# EAGLE board 13782-AK9753 Human Movement Sensor-panel.10 (EAGLE 7.5.0), part 1 of 6
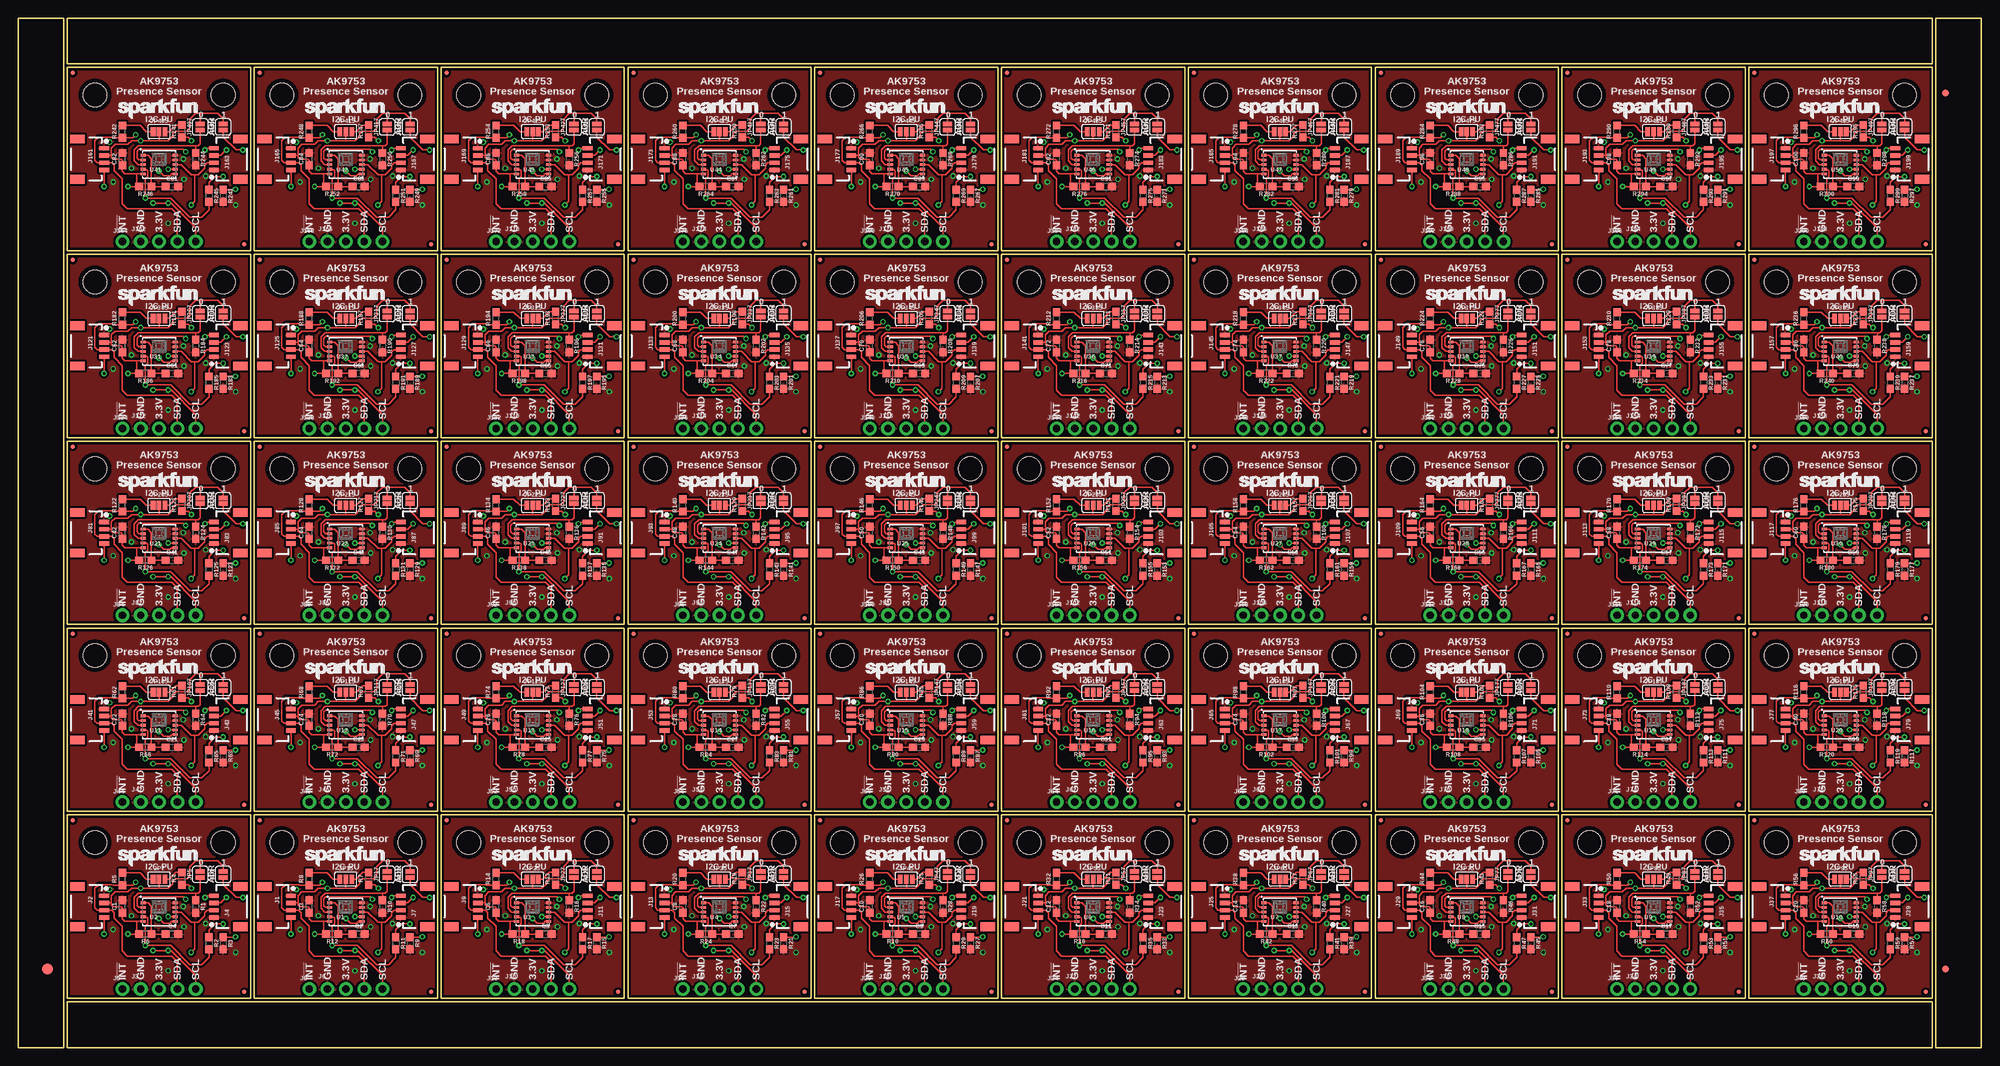
[diagram p0: board, top side]
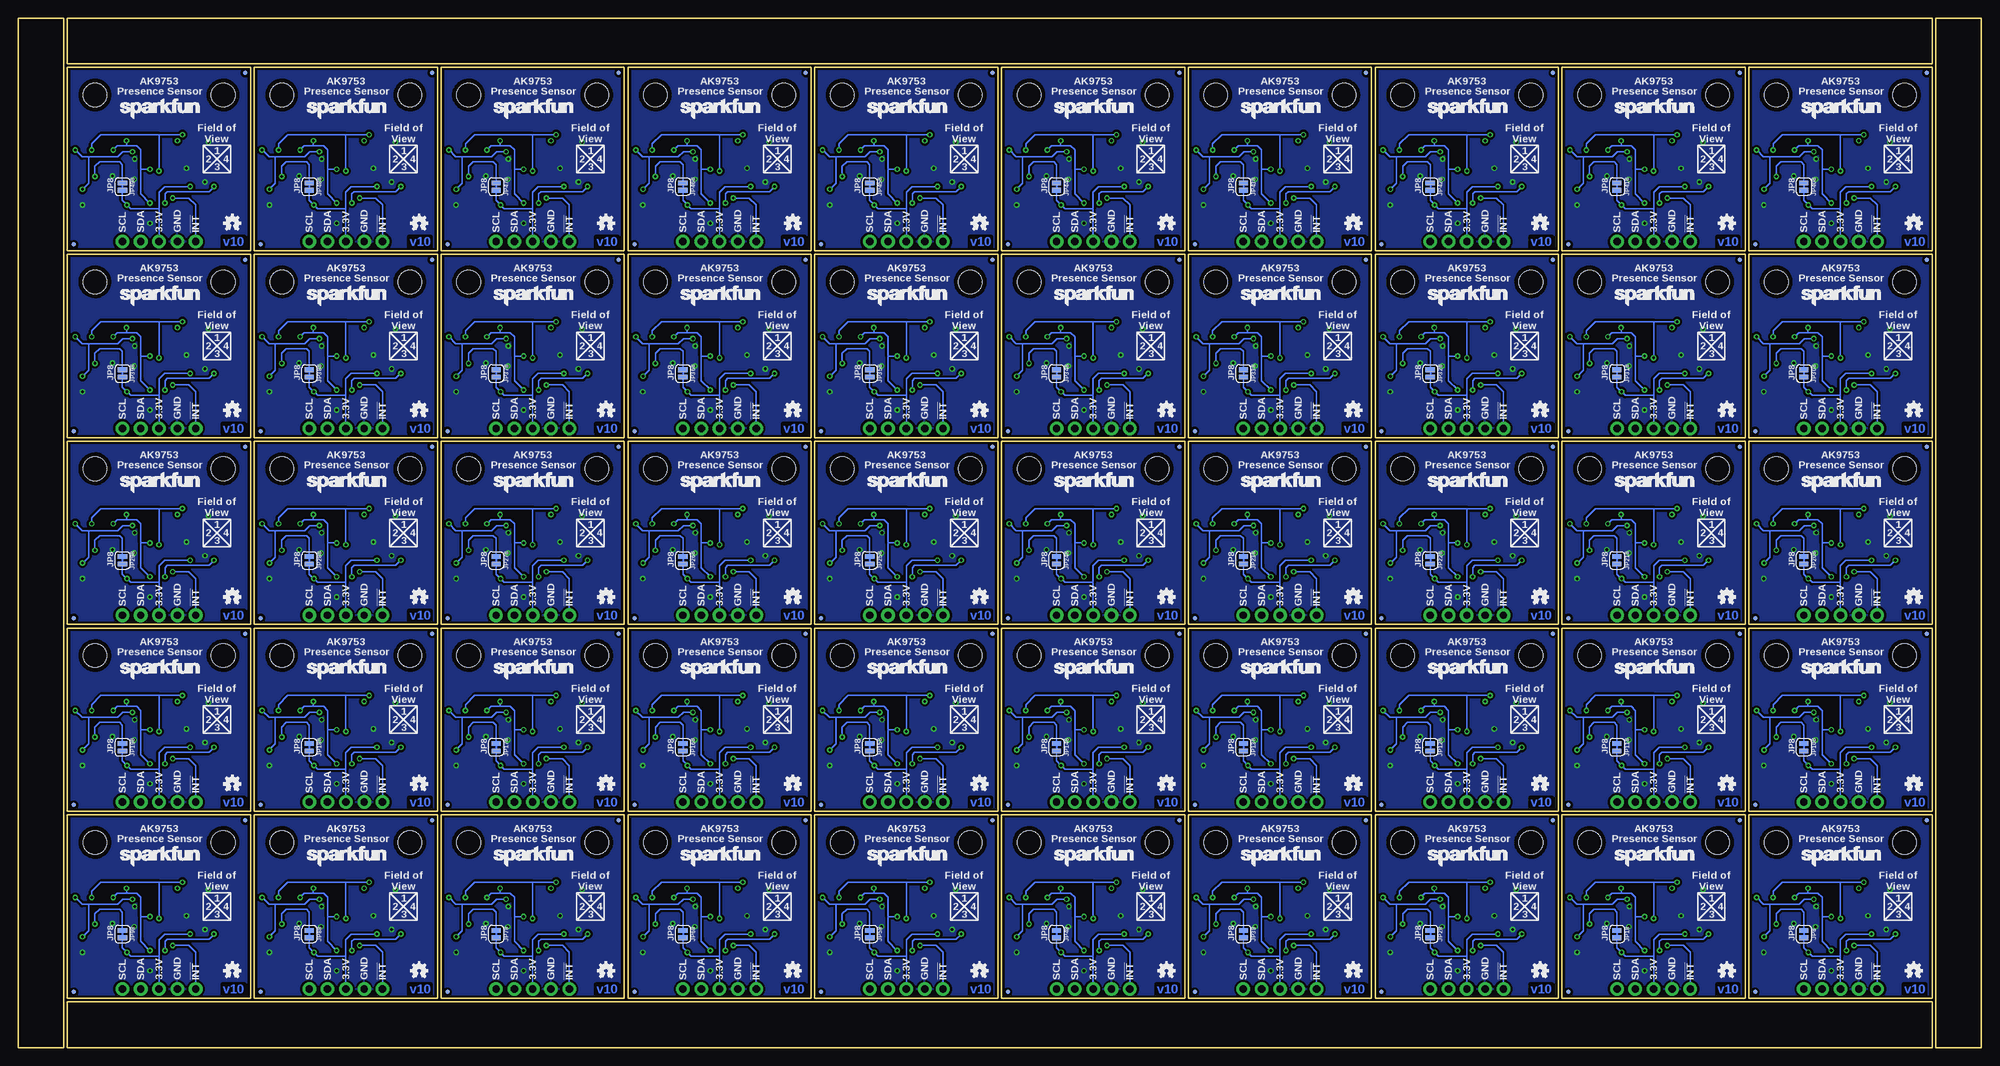
[diagram p1: board, bottom side, seen from below]

Size 272.29 x 142.75 mm. Coordinates in mm from the lower left corner, seen from the top.
Outline: 224 segments
Copper layers (1*16): Top 0.035mm / dielectric 1.5mm / Bottom 0.035mm
Design rules "SparkFun-2-layer-TIGHT": minimum track width 7mil, minimum drill 15mil, track to track 7mil, track to pad 7mil, pad to pad 7mil, via to via 7mil, smd to smd 7mil, copper to edge 7mil, drill to drill 7mil, minimum pad ring 7mil, minimum via ring 7mil, stop-mask expansion 4mil, vias tented up to drill 25mil, thermal gap 10mil

## Footprints (pad centres in the part's own frame; a part is rotated, then mirrored left to right if it is on the bottom)
0603 = smd 1.1 x 1: 1 -0.85,0; 2 0.85,0
FIDUCIAL-1.5X3 = smd 1.5 x 1.5: 1 0,0
FIDUCIAL-1X2 = smd 1 x 1: 1 0,0
1X04_1MM_RA = smd 0.6 x 1.35: 1 -1.5,0; 2 -0.5,0; 3 0.5,0; 4 1.5,0 | smd 1.2 x 2: NC1 2.8,-3.675; NC2 -2.8,-3.675
1X04_NO_SILK = drill 1.016 pad 1.88: 1 0,0; 2 2.54,0; 3 5.08,0; 4 7.62,0
1X01_NO_SILK = drill 1.016 pad 1.88: 1 0,0
SMT-JUMPER_2_NO_SILK = smd 0.635 x 1.27: 1 -0.406,0; 2 0.406,0
MICRO-FIDUCIAL = smd 0.635 x 0.635: 1 0,0
STAND-OFF = hole 3.302: 0,0
SMT-JUMPER_3_2-NC_PASTE_SILK = smd 0.635 x 1.27: 1 -0.813,0; 2 0,0; 3 0.813,0
SMT-JUMPER_2_NC_TRACE_SILK = smd 0.635 x 1.27: 1 -0.508,0; 2 0.508,0
SON10 = smd 0.7 x 0.38: 1 2.225,1.3; 2 2.225,0.65; 3 2.225,0; 4 2.225,-0.65; 5 2.225,-1.3; 6 -2.225,-1.3; 7 -2.225,-0.65; 8 -2.225,0; 9 -2.225,0.65; 10 -2.225,1.3

## Placement (x,y rotation side)
C1  1.0uF  [0603]  14.48,19.56 90 top
C2  1.0uF  [0603]  47.24,15.75 0 top
C3  1.0uF  [0603]  40.39,19.56 90 top
C4  1.0uF  [0603]  21.34,15.75 0 top
C5  1.0uF  [0603]  73.15,15.75 0 top
C6  1.0uF  [0603]  66.29,19.56 90 top
C7  1.0uF  [0603]  99.06,15.75 0 top
C8  1.0uF  [0603]  92.2,19.56 90 top
C9  1.0uF  [0603]  124.97,15.75 0 top
C10  1.0uF  [0603]  118.11,19.56 90 top
C11  1.0uF  [0603]  150.88,15.75 0 top
C12  1.0uF  [0603]  144.02,19.56 90 top
C13  1.0uF  [0603]  176.78,15.75 0 top
C14  1.0uF  [0603]  169.93,19.56 90 top
C15  1.0uF  [0603]  202.69,15.75 0 top
C16  1.0uF  [0603]  195.83,19.56 90 top
C17  1.0uF  [0603]  228.6,15.75 0 top
C18  1.0uF  [0603]  221.74,19.56 90 top
C19  1.0uF  [0603]  254.51,15.75 0 top
C20  1.0uF  [0603]  247.65,19.56 90 top
C21  1.0uF  [0603]  21.34,41.66 0 top
C22  1.0uF  [0603]  14.48,45.47 90 top
C23  1.0uF  [0603]  47.24,41.66 0 top
C24  1.0uF  [0603]  40.39,45.47 90 top
C25  1.0uF  [0603]  73.15,41.66 0 top
C26  1.0uF  [0603]  66.29,45.47 90 top
C27  1.0uF  [0603]  99.06,41.66 0 top
C28  1.0uF  [0603]  92.2,45.47 90 top
C29  1.0uF  [0603]  124.97,41.66 0 top
C30  1.0uF  [0603]  118.11,45.47 90 top
C31  1.0uF  [0603]  150.88,41.66 0 top
C32  1.0uF  [0603]  144.02,45.47 90 top
C33  1.0uF  [0603]  176.78,41.66 0 top
C34  1.0uF  [0603]  169.93,45.47 90 top
C35  1.0uF  [0603]  202.69,41.66 0 top
C36  1.0uF  [0603]  195.83,45.47 90 top
C37  1.0uF  [0603]  228.6,41.66 0 top
C38  1.0uF  [0603]  221.74,45.47 90 top
C39  1.0uF  [0603]  254.51,41.66 0 top
C40  1.0uF  [0603]  247.65,45.47 90 top
C41  1.0uF  [0603]  21.34,67.56 0 top
C42  1.0uF  [0603]  14.48,71.37 90 top
C43  1.0uF  [0603]  47.24,67.56 0 top
C44  1.0uF  [0603]  40.39,71.37 90 top
C45  1.0uF  [0603]  73.15,67.56 0 top
C46  1.0uF  [0603]  66.29,71.37 90 top
C47  1.0uF  [0603]  99.06,67.56 0 top
C48  1.0uF  [0603]  92.2,71.37 90 top
C49  1.0uF  [0603]  124.97,67.56 0 top
C50  1.0uF  [0603]  118.11,71.37 90 top
C51  1.0uF  [0603]  150.88,67.56 0 top
C52  1.0uF  [0603]  144.02,71.37 90 top
C53  1.0uF  [0603]  176.78,67.56 0 top
C54  1.0uF  [0603]  169.93,71.37 90 top
C55  1.0uF  [0603]  202.69,67.56 0 top
C56  1.0uF  [0603]  195.83,71.37 90 top
C57  1.0uF  [0603]  228.6,67.56 0 top
C58  1.0uF  [0603]  221.74,71.37 90 top
C59  1.0uF  [0603]  254.51,67.56 0 top
C60  1.0uF  [0603]  247.65,71.37 90 top
C61  1.0uF  [0603]  21.34,93.47 0 top
C62  1.0uF  [0603]  14.48,97.28 90 top
C63  1.0uF  [0603]  47.24,93.47 0 top
C64  1.0uF  [0603]  40.39,97.28 90 top
C65  1.0uF  [0603]  73.15,93.47 0 top
C66  1.0uF  [0603]  66.29,97.28 90 top
C67  1.0uF  [0603]  99.06,93.47 0 top
C68  1.0uF  [0603]  92.2,97.28 90 top
C69  1.0uF  [0603]  124.97,93.47 0 top
C70  1.0uF  [0603]  118.11,97.28 90 top
C71  1.0uF  [0603]  150.88,93.47 0 top
C72  1.0uF  [0603]  144.02,97.28 90 top
C73  1.0uF  [0603]  176.78,93.47 0 top
C74  1.0uF  [0603]  169.93,97.28 90 top
C75  1.0uF  [0603]  202.69,93.47 0 top
C76  1.0uF  [0603]  195.83,97.28 90 top
C77  1.0uF  [0603]  228.6,93.47 0 top
C78  1.0uF  [0603]  221.74,97.28 90 top
C79  1.0uF  [0603]  254.51,93.47 0 top
C80  1.0uF  [0603]  247.65,97.28 90 top
C81  1.0uF  [0603]  21.34,119.38 0 top
C82  1.0uF  [0603]  14.48,123.19 90 top
C83  1.0uF  [0603]  47.24,119.38 0 top
C84  1.0uF  [0603]  40.39,123.19 90 top
C85  1.0uF  [0603]  73.15,119.38 0 top
C86  1.0uF  [0603]  66.29,123.19 90 top
C87  1.0uF  [0603]  99.06,119.38 0 top
C88  1.0uF  [0603]  92.2,123.19 90 top
C89  1.0uF  [0603]  124.97,119.38 0 top
C90  1.0uF  [0603]  118.11,123.19 90 top
C91  1.0uF  [0603]  150.88,119.38 0 top
C92  1.0uF  [0603]  144.02,123.19 90 top
C93  1.0uF  [0603]  176.78,119.38 0 top
C94  1.0uF  [0603]  169.93,123.19 90 top
C95  1.0uF  [0603]  202.69,119.38 0 top
C96  1.0uF  [0603]  195.83,123.19 90 top
C97  1.0uF  [0603]  228.6,119.38 0 top
C98  1.0uF  [0603]  221.74,123.19 90 top
C99  1.0uF  [0603]  254.51,119.38 0 top
C100  1.0uF  [0603]  247.65,123.19 90 top
E$1  [FIDUCIAL-1.5X3]  4.06,10.92 0 top
E$7  [FIDUCIAL-1X2]  267.33,132.33 180 top
E$8  [FIDUCIAL-1X2]  267.33,10.92 0 top
J1  [1X04_1MM_RA]  37.85,19.56 270 top
J2  [1X04_1MM_RA]  11.94,19.56 270 top
J3  PTH  [1X04_NO_SILK]  17.02,8.13 0 top
J4  [1X04_1MM_RA]  27.18,19.56 90 top
J5  [1X01_NO_SILK]  14.48,8.13 0 top
J6  PTH  [1X04_NO_SILK]  42.93,8.13 0 top
J7  [1X04_1MM_RA]  53.09,19.56 90 top
J8  [1X01_NO_SILK]  40.39,8.13 0 top
J9  [1X04_1MM_RA]  63.75,19.56 270 top
J10  PTH  [1X04_NO_SILK]  68.83,8.13 0 top
J11  [1X04_1MM_RA]  78.99,19.56 90 top
J12  [1X01_NO_SILK]  66.29,8.13 0 top
J13  [1X04_1MM_RA]  89.66,19.56 270 top
J14  PTH  [1X04_NO_SILK]  94.74,8.13 0 top
J15  [1X04_1MM_RA]  104.9,19.56 90 top
J16  [1X01_NO_SILK]  92.2,8.13 0 top
J17  [1X04_1MM_RA]  115.57,19.56 270 top
J18  PTH  [1X04_NO_SILK]  120.65,8.13 0 top
J19  [1X04_1MM_RA]  130.81,19.56 90 top
J20  [1X01_NO_SILK]  118.11,8.13 0 top
J21  [1X04_1MM_RA]  141.48,19.56 270 top
J22  PTH  [1X04_NO_SILK]  146.56,8.13 0 top
J23  [1X04_1MM_RA]  156.72,19.56 90 top
J24  [1X01_NO_SILK]  144.02,8.13 0 top
J25  [1X04_1MM_RA]  167.39,19.56 270 top
J26  PTH  [1X04_NO_SILK]  172.47,8.13 0 top
J27  [1X04_1MM_RA]  182.63,19.56 90 top
J28  [1X01_NO_SILK]  169.93,8.13 0 top
J29  [1X04_1MM_RA]  193.29,19.56 270 top
J30  PTH  [1X04_NO_SILK]  198.37,8.13 0 top
J31  [1X04_1MM_RA]  208.53,19.56 90 top
J32  [1X01_NO_SILK]  195.83,8.13 0 top
J33  [1X04_1MM_RA]  219.2,19.56 270 top
J34  PTH  [1X04_NO_SILK]  224.28,8.13 0 top
J35  [1X04_1MM_RA]  234.44,19.56 90 top
J36  [1X01_NO_SILK]  221.74,8.13 0 top
J37  [1X04_1MM_RA]  245.11,19.56 270 top
J38  PTH  [1X04_NO_SILK]  250.19,8.13 0 top
J39  [1X04_1MM_RA]  260.35,19.56 90 top
J40  [1X01_NO_SILK]  247.65,8.13 0 top
J41  [1X04_1MM_RA]  11.94,45.47 270 top
J42  PTH  [1X04_NO_SILK]  17.02,34.04 0 top
J43  [1X04_1MM_RA]  27.18,45.47 90 top
J44  [1X01_NO_SILK]  14.48,34.04 0 top
J45  [1X04_1MM_RA]  37.85,45.47 270 top
J46  PTH  [1X04_NO_SILK]  42.93,34.04 0 top
J47  [1X04_1MM_RA]  53.09,45.47 90 top
J48  [1X01_NO_SILK]  40.39,34.04 0 top
J49  [1X04_1MM_RA]  63.75,45.47 270 top
J50  PTH  [1X04_NO_SILK]  68.83,34.04 0 top
J51  [1X04_1MM_RA]  78.99,45.47 90 top
J52  [1X01_NO_SILK]  66.29,34.04 0 top
J53  [1X04_1MM_RA]  89.66,45.47 270 top
J54  PTH  [1X04_NO_SILK]  94.74,34.04 0 top
J55  [1X04_1MM_RA]  104.9,45.47 90 top
J56  [1X01_NO_SILK]  92.2,34.04 0 top
J57  [1X04_1MM_RA]  115.57,45.47 270 top
J58  PTH  [1X04_NO_SILK]  120.65,34.04 0 top
J59  [1X04_1MM_RA]  130.81,45.47 90 top
J60  [1X01_NO_SILK]  118.11,34.04 0 top
J61  [1X04_1MM_RA]  141.48,45.47 270 top
J62  PTH  [1X04_NO_SILK]  146.56,34.04 0 top
J63  [1X04_1MM_RA]  156.72,45.47 90 top
J64  [1X01_NO_SILK]  144.02,34.04 0 top
J65  [1X04_1MM_RA]  167.39,45.47 270 top
J66  PTH  [1X04_NO_SILK]  172.47,34.04 0 top
J67  [1X04_1MM_RA]  182.63,45.47 90 top
J68  [1X01_NO_SILK]  169.93,34.04 0 top
J69  [1X04_1MM_RA]  193.29,45.47 270 top
J70  PTH  [1X04_NO_SILK]  198.37,34.04 0 top
J71  [1X04_1MM_RA]  208.53,45.47 90 top
J72  [1X01_NO_SILK]  195.83,34.04 0 top
J73  [1X04_1MM_RA]  219.2,45.47 270 top
J74  PTH  [1X04_NO_SILK]  224.28,34.04 0 top
J75  [1X04_1MM_RA]  234.44,45.47 90 top
J76  [1X01_NO_SILK]  221.74,34.04 0 top
J77  [1X04_1MM_RA]  245.11,45.47 270 top
J78  PTH  [1X04_NO_SILK]  250.19,34.04 0 top
J79  [1X04_1MM_RA]  260.35,45.47 90 top
J80  [1X01_NO_SILK]  247.65,34.04 0 top
J81  [1X04_1MM_RA]  11.94,71.37 270 top
J82  PTH  [1X04_NO_SILK]  17.02,59.94 0 top
J83  [1X04_1MM_RA]  27.18,71.37 90 top
J84  [1X01_NO_SILK]  14.48,59.94 0 top
J85  [1X04_1MM_RA]  37.85,71.37 270 top
J86  PTH  [1X04_NO_SILK]  42.93,59.94 0 top
J87  [1X04_1MM_RA]  53.09,71.37 90 top
J88  [1X01_NO_SILK]  40.39,59.94 0 top
J89  [1X04_1MM_RA]  63.75,71.37 270 top
J90  PTH  [1X04_NO_SILK]  68.83,59.94 0 top
J91  [1X04_1MM_RA]  78.99,71.37 90 top
J92  [1X01_NO_SILK]  66.29,59.94 0 top
J93  [1X04_1MM_RA]  89.66,71.37 270 top
J94  PTH  [1X04_NO_SILK]  94.74,59.94 0 top
J95  [1X04_1MM_RA]  104.9,71.37 90 top
J96  [1X01_NO_SILK]  92.2,59.94 0 top
J97  [1X04_1MM_RA]  115.57,71.37 270 top
J98  PTH  [1X04_NO_SILK]  120.65,59.94 0 top
J99  [1X04_1MM_RA]  130.81,71.37 90 top
J100  [1X01_NO_SILK]  118.11,59.94 0 top
J101  [1X04_1MM_RA]  141.48,71.37 270 top
J102  PTH  [1X04_NO_SILK]  146.56,59.94 0 top
J103  [1X04_1MM_RA]  156.72,71.37 90 top
J104  [1X01_NO_SILK]  144.02,59.94 0 top
J105  [1X04_1MM_RA]  167.39,71.37 270 top
J106  PTH  [1X04_NO_SILK]  172.47,59.94 0 top
J107  [1X04_1MM_RA]  182.63,71.37 90 top
J108  [1X01_NO_SILK]  169.93,59.94 0 top
J109  [1X04_1MM_RA]  193.29,71.37 270 top
J110  PTH  [1X04_NO_SILK]  198.37,59.94 0 top
J111  [1X04_1MM_RA]  208.53,71.37 90 top
J112  [1X01_NO_SILK]  195.83,59.94 0 top
J113  [1X04_1MM_RA]  219.2,71.37 270 top
J114  PTH  [1X04_NO_SILK]  224.28,59.94 0 top
J115  [1X04_1MM_RA]  234.44,71.37 90 top
J116  [1X01_NO_SILK]  221.74,59.94 0 top
J117  [1X04_1MM_RA]  245.11,71.37 270 top
J118  PTH  [1X04_NO_SILK]  250.19,59.94 0 top
J119  [1X04_1MM_RA]  260.35,71.37 90 top
J120  [1X01_NO_SILK]  247.65,59.94 0 top
J121  [1X04_1MM_RA]  11.94,97.28 270 top
J122  PTH  [1X04_NO_SILK]  17.02,85.85 0 top
J123  [1X04_1MM_RA]  27.18,97.28 90 top
J124  [1X01_NO_SILK]  14.48,85.85 0 top
J125  [1X04_1MM_RA]  37.85,97.28 270 top
J126  PTH  [1X04_NO_SILK]  42.93,85.85 0 top
J127  [1X04_1MM_RA]  53.09,97.28 90 top
J128  [1X01_NO_SILK]  40.39,85.85 0 top
J129  [1X04_1MM_RA]  63.75,97.28 270 top
J130  PTH  [1X04_NO_SILK]  68.83,85.85 0 top
J131  [1X04_1MM_RA]  78.99,97.28 90 top
J132  [1X01_NO_SILK]  66.29,85.85 0 top
J133  [1X04_1MM_RA]  89.66,97.28 270 top
J134  PTH  [1X04_NO_SILK]  94.74,85.85 0 top
J135  [1X04_1MM_RA]  104.9,97.28 90 top
J136  [1X01_NO_SILK]  92.2,85.85 0 top
J137  [1X04_1MM_RA]  115.57,97.28 270 top
J138  PTH  [1X04_NO_SILK]  120.65,85.85 0 top
J139  [1X04_1MM_RA]  130.81,97.28 90 top
J140  [1X01_NO_SILK]  118.11,85.85 0 top
J141  [1X04_1MM_RA]  141.48,97.28 270 top
J142  PTH  [1X04_NO_SILK]  146.56,85.85 0 top
J143  [1X04_1MM_RA]  156.72,97.28 90 top
J144  [1X01_NO_SILK]  144.02,85.85 0 top
J145  [1X04_1MM_RA]  167.39,97.28 270 top
J146  PTH  [1X04_NO_SILK]  172.47,85.85 0 top
J147  [1X04_1MM_RA]  182.63,97.28 90 top
J148  [1X01_NO_SILK]  169.93,85.85 0 top
J149  [1X04_1MM_RA]  193.29,97.28 270 top
J150  PTH  [1X04_NO_SILK]  198.37,85.85 0 top
J151  [1X04_1MM_RA]  208.53,97.28 90 top
J152  [1X01_NO_SILK]  195.83,85.85 0 top
J153  [1X04_1MM_RA]  219.2,97.28 270 top
J154  PTH  [1X04_NO_SILK]  224.28,85.85 0 top
J155  [1X04_1MM_RA]  234.44,97.28 90 top
J156  [1X01_NO_SILK]  221.74,85.85 0 top
J157  [1X04_1MM_RA]  245.11,97.28 270 top
J158  PTH  [1X04_NO_SILK]  250.19,85.85 0 top
J159  [1X04_1MM_RA]  260.35,97.28 90 top
J160  [1X01_NO_SILK]  247.65,85.85 0 top
J161  [1X04_1MM_RA]  11.94,123.19 270 top
J162  PTH  [1X04_NO_SILK]  17.02,111.76 0 top
J163  [1X04_1MM_RA]  27.18,123.19 90 top
J164  [1X01_NO_SILK]  14.48,111.76 0 top
J165  [1X04_1MM_RA]  37.85,123.19 270 top
J166  PTH  [1X04_NO_SILK]  42.93,111.76 0 top
J167  [1X04_1MM_RA]  53.09,123.19 90 top
J168  [1X01_NO_SILK]  40.39,111.76 0 top
J169  [1X04_1MM_RA]  63.75,123.19 270 top
J170  PTH  [1X04_NO_SILK]  68.83,111.76 0 top
J171  [1X04_1MM_RA]  78.99,123.19 90 top
J172  [1X01_NO_SILK]  66.29,111.76 0 top
J173  [1X04_1MM_RA]  89.66,123.19 270 top
J174  PTH  [1X04_NO_SILK]  94.74,111.76 0 top
J175  [1X04_1MM_RA]  104.9,123.19 90 top
J176  [1X01_NO_SILK]  92.2,111.76 0 top
J177  [1X04_1MM_RA]  115.57,123.19 270 top
J178  PTH  [1X04_NO_SILK]  120.65,111.76 0 top
J179  [1X04_1MM_RA]  130.81,123.19 90 top
J180  [1X01_NO_SILK]  118.11,111.76 0 top
J181  [1X04_1MM_RA]  141.48,123.19 270 top
J182  PTH  [1X04_NO_SILK]  146.56,111.76 0 top
J183  [1X04_1MM_RA]  156.72,123.19 90 top
J184  [1X01_NO_SILK]  144.02,111.76 0 top
J185  [1X04_1MM_RA]  167.39,123.19 270 top
J186  PTH  [1X04_NO_SILK]  172.47,111.76 0 top
J187  [1X04_1MM_RA]  182.63,123.19 90 top
J188  [1X01_NO_SILK]  169.93,111.76 0 top
J189  [1X04_1MM_RA]  193.29,123.19 270 top
J190  PTH  [1X04_NO_SILK]  198.37,111.76 0 top
J191  [1X04_1MM_RA]  208.53,123.19 90 top
J192  [1X01_NO_SILK]  195.83,111.76 0 top
J193  [1X04_1MM_RA]  219.2,123.19 270 top
J194  PTH  [1X04_NO_SILK]  224.28,111.76 0 top
J195  [1X04_1MM_RA]  234.44,123.19 90 top
J196  [1X01_NO_SILK]  221.74,111.76 0 top
J197  [1X04_1MM_RA]  245.11,123.19 270 top
J198  PTH  [1X04_NO_SILK]  250.19,111.76 0 top
J199  [1X04_1MM_RA]  260.35,123.19 90 top
J200  [1X01_NO_SILK]  247.65,111.76 0 top
JP1  [SMT-JUMPER_2_NO_SILK]  28.45,24 90 top
JP2  FIDUCIALUFIDUCIAL  [MICRO-FIDUCIAL]  31.37,7.75 0 top
JP3  STAND-OFF  [STAND-OFF]  10.67,28.45 0 top
JP4  STAND-OFF  [STAND-OFF]  28.45,28.45 0 top
JP5  [SMT-JUMPER_2_NO_SILK]  25.27,24 90 top
JP6  FIDUCIALUFIDUCIAL  [MICRO-FIDUCIAL]  7.62,31.5 0 top
JP7  [SMT-JUMPER_3_2-NC_PASTE_SILK]  19.56,23.37 0 top
JP8  [SMT-JUMPER_2_NC_TRACE_SILK]  24.64,15.75 270 bottom
JP9  FIDUCIALUFIDUCIAL  [MICRO-FIDUCIAL]  7.62,31.5 0 bottom
JP10  FIDUCIALUFIDUCIAL  [MICRO-FIDUCIAL]  31.37,7.75 0 bottom
JP11  STAND-OFF  [STAND-OFF]  36.58,28.45 0 top
JP12  STAND-OFF  [STAND-OFF]  54.36,28.45 0 top
JP13  FIDUCIALUFIDUCIAL  [MICRO-FIDUCIAL]  57.28,7.75 0 top
JP14  FIDUCIALUFIDUCIAL  [MICRO-FIDUCIAL]  33.53,31.5 0 top
JP15  [SMT-JUMPER_3_2-NC_PASTE_SILK]  45.47,23.37 0 top
JP16  [SMT-JUMPER_2_NO_SILK]  54.36,24 90 top
JP17  [SMT-JUMPER_2_NO_SILK]  51.18,24 90 top
JP18  [SMT-JUMPER_2_NC_TRACE_SILK]  50.55,15.75 270 bottom
JP19  FIDUCIALUFIDUCIAL  [MICRO-FIDUCIAL]  33.53,31.5 0 bottom
JP20  FIDUCIALUFIDUCIAL  [MICRO-FIDUCIAL]  57.28,7.75 0 bottom
JP21  STAND-OFF  [STAND-OFF]  62.48,28.45 0 top
JP22  STAND-OFF  [STAND-OFF]  80.26,28.45 0 top
JP23  FIDUCIALUFIDUCIAL  [MICRO-FIDUCIAL]  83.19,7.75 0 top
JP24  FIDUCIALUFIDUCIAL  [MICRO-FIDUCIAL]  59.44,31.5 0 top
JP25  [SMT-JUMPER_3_2-NC_PASTE_SILK]  71.37,23.37 0 top
JP26  [SMT-JUMPER_2_NO_SILK]  80.26,24 90 top
JP27  [SMT-JUMPER_2_NO_SILK]  77.09,24 90 top
JP28  [SMT-JUMPER_2_NC_TRACE_SILK]  76.45,15.75 270 bottom
JP29  FIDUCIALUFIDUCIAL  [MICRO-FIDUCIAL]  59.44,31.5 0 bottom
JP30  FIDUCIALUFIDUCIAL  [MICRO-FIDUCIAL]  83.19,7.75 0 bottom
JP31  STAND-OFF  [STAND-OFF]  88.39,28.45 0 top
JP32  STAND-OFF  [STAND-OFF]  106.17,28.45 0 top
JP33  FIDUCIALUFIDUCIAL  [MICRO-FIDUCIAL]  109.09,7.75 0 top
JP34  FIDUCIALUFIDUCIAL  [MICRO-FIDUCIAL]  85.34,31.5 0 top
JP35  [SMT-JUMPER_3_2-NC_PASTE_SILK]  97.28,23.37 0 top
JP36  [SMT-JUMPER_2_NO_SILK]  106.17,24 90 top
JP37  [SMT-JUMPER_2_NO_SILK]  103,24 90 top
JP38  [SMT-JUMPER_2_NC_TRACE_SILK]  102.36,15.75 270 bottom
JP39  FIDUCIALUFIDUCIAL  [MICRO-FIDUCIAL]  85.34,31.5 0 bottom
JP40  FIDUCIALUFIDUCIAL  [MICRO-FIDUCIAL]  109.09,7.75 0 bottom
JP41  STAND-OFF  [STAND-OFF]  114.3,28.45 0 top
JP42  STAND-OFF  [STAND-OFF]  132.08,28.45 0 top
JP43  FIDUCIALUFIDUCIAL  [MICRO-FIDUCIAL]  135,7.75 0 top
JP44  FIDUCIALUFIDUCIAL  [MICRO-FIDUCIAL]  111.25,31.5 0 top
JP45  [SMT-JUMPER_3_2-NC_PASTE_SILK]  123.19,23.37 0 top
JP46  [SMT-JUMPER_2_NO_SILK]  132.08,24 90 top
JP47  [SMT-JUMPER_2_NO_SILK]  128.91,24 90 top
JP48  [SMT-JUMPER_2_NC_TRACE_SILK]  128.27,15.75 270 bottom
JP49  FIDUCIALUFIDUCIAL  [MICRO-FIDUCIAL]  111.25,31.5 0 bottom
JP50  FIDUCIALUFIDUCIAL  [MICRO-FIDUCIAL]  135,7.75 0 bottom
JP51  STAND-OFF  [STAND-OFF]  140.21,28.45 0 top
JP52  STAND-OFF  [STAND-OFF]  157.99,28.45 0 top
JP53  FIDUCIALUFIDUCIAL  [MICRO-FIDUCIAL]  160.91,7.75 0 top
JP54  FIDUCIALUFIDUCIAL  [MICRO-FIDUCIAL]  137.16,31.5 0 top
JP55  [SMT-JUMPER_3_2-NC_PASTE_SILK]  149.1,23.37 0 top
JP56  [SMT-JUMPER_2_NO_SILK]  157.99,24 90 top
JP57  [SMT-JUMPER_2_NO_SILK]  154.81,24 90 top
JP58  [SMT-JUMPER_2_NC_TRACE_SILK]  154.18,15.75 270 bottom
JP59  FIDUCIALUFIDUCIAL  [MICRO-FIDUCIAL]  137.16,31.5 0 bottom
JP60  FIDUCIALUFIDUCIAL  [MICRO-FIDUCIAL]  160.91,7.75 0 bottom
JP61  STAND-OFF  [STAND-OFF]  166.12,28.45 0 top
JP62  STAND-OFF  [STAND-OFF]  183.9,28.45 0 top
JP63  FIDUCIALUFIDUCIAL  [MICRO-FIDUCIAL]  186.82,7.75 0 top
JP64  FIDUCIALUFIDUCIAL  [MICRO-FIDUCIAL]  163.07,31.5 0 top
JP65  [SMT-JUMPER_3_2-NC_PASTE_SILK]  175.01,23.37 0 top
JP66  [SMT-JUMPER_2_NO_SILK]  183.9,24 90 top
JP67  [SMT-JUMPER_2_NO_SILK]  180.72,24 90 top
JP68  [SMT-JUMPER_2_NC_TRACE_SILK]  180.09,15.75 270 bottom
JP69  FIDUCIALUFIDUCIAL  [MICRO-FIDUCIAL]  163.07,31.5 0 bottom
JP70  FIDUCIALUFIDUCIAL  [MICRO-FIDUCIAL]  186.82,7.75 0 bottom
JP71  STAND-OFF  [STAND-OFF]  192.02,28.45 0 top
JP72  STAND-OFF  [STAND-OFF]  209.8,28.45 0 top
JP73  FIDUCIALUFIDUCIAL  [MICRO-FIDUCIAL]  212.72,7.75 0 top
JP74  FIDUCIALUFIDUCIAL  [MICRO-FIDUCIAL]  188.98,31.5 0 top
JP75  [SMT-JUMPER_3_2-NC_PASTE_SILK]  200.91,23.37 0 top
JP76  [SMT-JUMPER_2_NO_SILK]  209.8,24 90 top
JP77  [SMT-JUMPER_2_NO_SILK]  206.63,24 90 top
JP78  [SMT-JUMPER_2_NC_TRACE_SILK]  205.99,15.75 270 bottom
JP79  FIDUCIALUFIDUCIAL  [MICRO-FIDUCIAL]  188.98,31.5 0 bottom
JP80  FIDUCIALUFIDUCIAL  [MICRO-FIDUCIAL]  212.72,7.75 0 bottom
JP81  STAND-OFF  [STAND-OFF]  217.93,28.45 0 top
JP82  STAND-OFF  [STAND-OFF]  235.71,28.45 0 top
JP83  FIDUCIALUFIDUCIAL  [MICRO-FIDUCIAL]  238.63,7.75 0 top
JP84  FIDUCIALUFIDUCIAL  [MICRO-FIDUCIAL]  214.88,31.5 0 top
JP85  [SMT-JUMPER_3_2-NC_PASTE_SILK]  226.82,23.37 0 top
JP86  [SMT-JUMPER_2_NO_SILK]  235.71,24 90 top
JP87  [SMT-JUMPER_2_NO_SILK]  232.54,24 90 top
JP88  [SMT-JUMPER_2_NC_TRACE_SILK]  231.9,15.75 270 bottom
JP89  FIDUCIALUFIDUCIAL  [MICRO-FIDUCIAL]  214.88,31.5 0 bottom
JP90  FIDUCIALUFIDUCIAL  [MICRO-FIDUCIAL]  238.63,7.75 0 bottom
JP91  STAND-OFF  [STAND-OFF]  243.84,28.45 0 top
JP92  STAND-OFF  [STAND-OFF]  261.62,28.45 0 top
JP93  FIDUCIALUFIDUCIAL  [MICRO-FIDUCIAL]  264.54,7.75 0 top
JP94  FIDUCIALUFIDUCIAL  [MICRO-FIDUCIAL]  240.79,31.5 0 top
JP95  [SMT-JUMPER_3_2-NC_PASTE_SILK]  252.73,23.37 0 top
JP96  [SMT-JUMPER_2_NO_SILK]  261.62,24 90 top
JP97  [SMT-JUMPER_2_NO_SILK]  258.44,24 90 top
JP98  [SMT-JUMPER_2_NC_TRACE_SILK]  257.81,15.75 270 bottom
JP99  FIDUCIALUFIDUCIAL  [MICRO-FIDUCIAL]  240.79,31.5 0 bottom
JP100  FIDUCIALUFIDUCIAL  [MICRO-FIDUCIAL]  264.54,7.75 0 bottom
JP101  STAND-OFF  [STAND-OFF]  10.67,54.36 0 top
JP102  STAND-OFF  [STAND-OFF]  28.45,54.36 0 top
JP103  FIDUCIALUFIDUCIAL  [MICRO-FIDUCIAL]  31.37,33.66 0 top
JP104  FIDUCIALUFIDUCIAL  [MICRO-FIDUCIAL]  7.62,57.4 0 top
JP105  [SMT-JUMPER_3_2-NC_PASTE_SILK]  19.56,49.28 0 top
JP106  [SMT-JUMPER_2_NO_SILK]  28.45,49.91 90 top
JP107  [SMT-JUMPER_2_NO_SILK]  25.27,49.91 90 top
JP108  [SMT-JUMPER_2_NC_TRACE_SILK]  24.64,41.66 270 bottom
JP109  FIDUCIALUFIDUCIAL  [MICRO-FIDUCIAL]  7.62,57.4 0 bottom
JP110  FIDUCIALUFIDUCIAL  [MICRO-FIDUCIAL]  31.37,33.66 0 bottom
JP111  STAND-OFF  [STAND-OFF]  36.58,54.36 0 top
JP112  STAND-OFF  [STAND-OFF]  54.36,54.36 0 top
JP113  FIDUCIALUFIDUCIAL  [MICRO-FIDUCIAL]  57.28,33.66 0 top
JP114  FIDUCIALUFIDUCIAL  [MICRO-FIDUCIAL]  33.53,57.4 0 top
JP115  [SMT-JUMPER_3_2-NC_PASTE_SILK]  45.47,49.28 0 top
JP116  [SMT-JUMPER_2_NO_SILK]  54.36,49.91 90 top
JP117  [SMT-JUMPER_2_NO_SILK]  51.18,49.91 90 top
JP118  [SMT-JUMPER_2_NC_TRACE_SILK]  50.55,41.66 270 bottom
JP119  FIDUCIALUFIDUCIAL  [MICRO-FIDUCIAL]  33.53,57.4 0 bottom
JP120  FIDUCIALUFIDUCIAL  [MICRO-FIDUCIAL]  57.28,33.66 0 bottom
JP121  STAND-OFF  [STAND-OFF]  62.48,54.36 0 top
JP122  STAND-OFF  [STAND-OFF]  80.26,54.36 0 top
JP123  FIDUCIALUFIDUCIAL  [MICRO-FIDUCIAL]  83.19,33.66 0 top
JP124  FIDUCIALUFIDUCIAL  [MICRO-FIDUCIAL]  59.44,57.4 0 top
JP125  [SMT-JUMPER_3_2-NC_PASTE_SILK]  71.37,49.28 0 top
JP126  [SMT-JUMPER_2_NO_SILK]  80.26,49.91 90 top
JP127  [SMT-JUMPER_2_NO_SILK]  77.09,49.91 90 top
JP128  [SMT-JUMPER_2_NC_TRACE_SILK]  76.45,41.66 270 bottom
JP129  FIDUCIALUFIDUCIAL  [MICRO-FIDUCIAL]  59.44,57.4 0 bottom
JP130  FIDUCIALUFIDUCIAL  [MICRO-FIDUCIAL]  83.19,33.66 0 bottom
JP131  STAND-OFF  [STAND-OFF]  88.39,54.36 0 top
JP132  STAND-OFF  [STAND-OFF]  106.17,54.36 0 top
JP133  FIDUCIALUFIDUCIAL  [MICRO-FIDUCIAL]  109.09,33.66 0 top
JP134  FIDUCIALUFIDUCIAL  [MICRO-FIDUCIAL]  85.34,57.4 0 top
JP135  [SMT-JUMPER_3_2-NC_PASTE_SILK]  97.28,49.28 0 top
JP136  [SMT-JUMPER_2_NO_SILK]  106.17,49.91 90 top
JP137  [SMT-JUMPER_2_NO_SILK]  103,49.91 90 top
JP138  [SMT-JUMPER_2_NC_TRACE_SILK]  102.36,41.66 270 bottom
JP139  FIDUCIALUFIDUCIAL  [MICRO-FIDUCIAL]  85.34,57.4 0 bottom
JP140  FIDUCIALUFIDUCIAL  [MICRO-FIDUCIAL]  109.09,33.66 0 bottom
JP141  STAND-OFF  [STAND-OFF]  114.3,54.36 0 top
JP142  STAND-OFF  [STAND-OFF]  132.08,54.36 0 top
JP143  FIDUCIALUFIDUCIAL  [MICRO-FIDUCIAL]  135,33.66 0 top
JP144  FIDUCIALUFIDUCIAL  [MICRO-FIDUCIAL]  111.25,57.4 0 top
JP145  [SMT-JUMPER_3_2-NC_PASTE_SILK]  123.19,49.28 0 top
JP146  [SMT-JUMPER_2_NO_SILK]  132.08,49.91 90 top
JP147  [SMT-JUMPER_2_NO_SILK]  128.91,49.91 90 top
JP148  [SMT-JUMPER_2_NC_TRACE_SILK]  128.27,41.66 270 bottom
JP149  FIDUCIALUFIDUCIAL  [MICRO-FIDUCIAL]  111.25,57.4 0 bottom
JP150  FIDUCIALUFIDUCIAL  [MICRO-FIDUCIAL]  135,33.66 0 bottom
JP151  STAND-OFF  [STAND-OFF]  140.21,54.36 0 top
JP152  STAND-OFF  [STAND-OFF]  157.99,54.36 0 top
JP153  FIDUCIALUFIDUCIAL  [MICRO-FIDUCIAL]  160.91,33.66 0 top
JP154  FIDUCIALUFIDUCIAL  [MICRO-FIDUCIAL]  137.16,57.4 0 top
JP155  [SMT-JUMPER_3_2-NC_PASTE_SILK]  149.1,49.28 0 top
JP156  [SMT-JUMPER_2_NO_SILK]  157.99,49.91 90 top
JP157  [SMT-JUMPER_2_NO_SILK]  154.81,49.91 90 top
JP158  [SMT-JUMPER_2_NC_TRACE_SILK]  154.18,41.66 270 bottom
JP159  FIDUCIALUFIDUCIAL  [MICRO-FIDUCIAL]  137.16,57.4 0 bottom
JP160  FIDUCIALUFIDUCIAL  [MICRO-FIDUCIAL]  160.91,33.66 0 bottom
JP161  STAND-OFF  [STAND-OFF]  166.12,54.36 0 top
JP162  STAND-OFF  [STAND-OFF]  183.9,54.36 0 top
JP163  FIDUCIALUFIDUCIAL  [MICRO-FIDUCIAL]  186.82,33.66 0 top
JP164  FIDUCIALUFIDUCIAL  [MICRO-FIDUCIAL]  163.07,57.4 0 top
JP165  [SMT-JUMPER_3_2-NC_PASTE_SILK]  175.01,49.28 0 top
JP166  [SMT-JUMPER_2_NO_SILK]  183.9,49.91 90 top
JP167  [SMT-JUMPER_2_NO_SILK]  180.72,49.91 90 top
JP168  [SMT-JUMPER_2_NC_TRACE_SILK]  180.09,41.66 270 bottom
JP169  FIDUCIALUFIDUCIAL  [MICRO-FIDUCIAL]  163.07,57.4 0 bottom
JP170  FIDUCIALUFIDUCIAL  [MICRO-FIDUCIAL]  186.82,33.66 0 bottom
JP171  STAND-OFF  [STAND-OFF]  192.02,54.36 0 top
JP172  STAND-OFF  [STAND-OFF]  209.8,54.36 0 top
JP173  FIDUCIALUFIDUCIAL  [MICRO-FIDUCIAL]  212.72,33.66 0 top
JP174  FIDUCIALUFIDUCIAL  [MICRO-FIDUCIAL]  188.98,57.4 0 top
JP175  [SMT-JUMPER_3_2-NC_PASTE_SILK]  200.91,49.28 0 top
JP176  [SMT-JUMPER_2_NO_SILK]  209.8,49.91 90 top
JP177  [SMT-JUMPER_2_NO_SILK]  206.63,49.91 90 top
JP178  [SMT-JUMPER_2_NC_TRACE_SILK]  205.99,41.66 270 bottom
JP179  FIDUCIALUFIDUCIAL  [MICRO-FIDUCIAL]  188.98,57.4 0 bottom
JP180  FIDUCIALUFIDUCIAL  [MICRO-FIDUCIAL]  212.72,33.66 0 bottom
JP181  STAND-OFF  [STAND-OFF]  217.93,54.36 0 top
JP182  STAND-OFF  [STAND-OFF]  235.71,54.36 0 top
JP183  FIDUCIALUFIDUCIAL  [MICRO-FIDUCIAL]  238.63,33.66 0 top
JP184  FIDUCIALUFIDUCIAL  [MICRO-FIDUCIAL]  214.88,57.4 0 top
JP185  [SMT-JUMPER_3_2-NC_PASTE_SILK]  226.82,49.28 0 top
JP186  [SMT-JUMPER_2_NO_SILK]  235.71,49.91 90 top
JP187  [SMT-JUMPER_2_NO_SILK]  232.54,49.91 90 top
JP188  [SMT-JUMPER_2_NC_TRACE_SILK]  231.9,41.66 270 bottom
JP189  FIDUCIALUFIDUCIAL  [MICRO-FIDUCIAL]  214.88,57.4 0 bottom
JP190  FIDUCIALUFIDUCIAL  [MICRO-FIDUCIAL]  238.63,33.66 0 bottom
JP191  STAND-OFF  [STAND-OFF]  243.84,54.36 0 top
JP192  STAND-OFF  [STAND-OFF]  261.62,54.36 0 top
JP193  FIDUCIALUFIDUCIAL  [MICRO-FIDUCIAL]  264.54,33.66 0 top
JP194  FIDUCIALUFIDUCIAL  [MICRO-FIDUCIAL]  240.79,57.4 0 top
JP195  [SMT-JUMPER_3_2-NC_PASTE_SILK]  252.73,49.28 0 top
JP196  [SMT-JUMPER_2_NO_SILK]  261.62,49.91 90 top
JP197  [SMT-JUMPER_2_NO_SILK]  258.44,49.91 90 top
JP198  [SMT-JUMPER_2_NC_TRACE_SILK]  257.81,41.66 270 bottom
JP199  FIDUCIALUFIDUCIAL  [MICRO-FIDUCIAL]  240.79,57.4 0 bottom
JP200  FIDUCIALUFIDUCIAL  [MICRO-FIDUCIAL]  264.54,33.66 0 bottom
JP201  STAND-OFF  [STAND-OFF]  10.67,80.26 0 top
JP202  STAND-OFF  [STAND-OFF]  28.45,80.26 0 top
JP203  FIDUCIALUFIDUCIAL  [MICRO-FIDUCIAL]  31.37,59.56 0 top
JP204  FIDUCIALUFIDUCIAL  [MICRO-FIDUCIAL]  7.62,83.31 0 top
JP205  [SMT-JUMPER_3_2-NC_PASTE_SILK]  19.56,75.18 0 top
JP206  [SMT-JUMPER_2_NO_SILK]  28.45,75.82 90 top
JP207  [SMT-JUMPER_2_NO_SILK]  25.27,75.82 90 top
JP208  [SMT-JUMPER_2_NC_TRACE_SILK]  24.64,67.56 270 bottom
JP209  FIDUCIALUFIDUCIAL  [MICRO-FIDUCIAL]  7.62,83.31 0 bottom
JP210  FIDUCIALUFIDUCIAL  [MICRO-FIDUCIAL]  31.37,59.56 0 bottom
JP211  STAND-OFF  [STAND-OFF]  36.58,80.26 0 top
JP212  STAND-OFF  [STAND-OFF]  54.36,80.26 0 top
JP213  FIDUCIALUFIDUCIAL  [MICRO-FIDUCIAL]  57.28,59.56 0 top
JP214  FIDUCIALUFIDUCIAL  [MICRO-FIDUCIAL]  33.53,83.31 0 top
JP215  [SMT-JUMPER_3_2-NC_PASTE_SILK]  45.47,75.18 0 top
JP216  [SMT-JUMPER_2_NO_SILK]  54.36,75.82 90 top
JP217  [SMT-JUMPER_2_NO_SILK]  51.18,75.82 90 top
JP218  [SMT-JUMPER_2_NC_TRACE_SILK]  50.55,67.56 270 bottom
JP219  FIDUCIALUFIDUCIAL  [MICRO-FIDUCIAL]  33.53,83.31 0 bottom
JP220  FIDUCIALUFIDUCIAL  [MICRO-FIDUCIAL]  57.28,59.56 0 bottom
JP221  STAND-OFF  [STAND-OFF]  62.48,80.26 0 top
JP222  STAND-OFF  [STAND-OFF]  80.26,80.26 0 top
JP223  FIDUCIALUFIDUCIAL  [MICRO-FIDUCIAL]  83.19,59.56 0 top
JP224  FIDUCIALUFIDUCIAL  [MICRO-FIDUCIAL]  59.44,83.31 0 top
JP225  [SMT-JUMPER_3_2-NC_PASTE_SILK]  71.37,75.18 0 top
JP226  [SMT-JUMPER_2_NO_SILK]  80.26,75.82 90 top
JP227  [SMT-JUMPER_2_NO_SILK]  77.09,75.82 90 top
JP228  [SMT-JUMPER_2_NC_TRACE_SILK]  76.45,67.56 270 bottom
JP229  FIDUCIALUFIDUCIAL  [MICRO-FIDUCIAL]  59.44,83.31 0 bottom
JP230  FIDUCIALUFIDUCIAL  [MICRO-FIDUCIAL]  83.19,59.56 0 bottom
JP231  STAND-OFF  [STAND-OFF]  88.39,80.26 0 top
JP232  STAND-OFF  [STAND-OFF]  106.17,80.26 0 top
JP233  FIDUCIALUFIDUCIAL  [MICRO-FIDUCIAL]  109.09,59.56 0 top
JP234  FIDUCIALUFIDUCIAL  [MICRO-FIDUCIAL]  85.34,83.31 0 top
JP235  [SMT-JUMPER_3_2-NC_PASTE_SILK]  97.28,75.18 0 top
JP236  [SMT-JUMPER_2_NO_SILK]  106.17,75.82 90 top
JP237  [SMT-JUMPER_2_NO_SILK]  103,75.82 90 top
JP238  [SMT-JUMPER_2_NC_TRACE_SILK]  102.36,67.56 270 bottom
JP239  FIDUCIALUFIDUCIAL  [MICRO-FIDUCIAL]  85.34,83.31 0 bottom
JP240  FIDUCIALUFIDUCIAL  [MICRO-FIDUCIAL]  109.09,59.56 0 bottom
JP241  STAND-OFF  [STAND-OFF]  114.3,80.26 0 top
JP242  STAND-OFF  [STAND-OFF]  132.08,80.26 0 top
JP243  FIDUCIALUFIDUCIAL  [MICRO-FIDUCIAL]  135,59.56 0 top
JP244  FIDUCIALUFIDUCIAL  [MICRO-FIDUCIAL]  111.25,83.31 0 top
JP245  [SMT-JUMPER_3_2-NC_PASTE_SILK]  123.19,75.18 0 top
JP246  [SMT-JUMPER_2_NO_SILK]  132.08,75.82 90 top
JP247  [SMT-JUMPER_2_NO_SILK]  128.91,75.82 90 top
JP248  [SMT-JUMPER_2_NC_TRACE_SILK]  128.27,67.56 270 bottom
JP249  FIDUCIALUFIDUCIAL  [MICRO-FIDUCIAL]  111.25,83.31 0 bottom
JP250  FIDUCIALUFIDUCIAL  [MICRO-FIDUCIAL]  135,59.56 0 bottom
JP251  STAND-OFF  [STAND-OFF]  140.21,80.26 0 top
JP252  STAND-OFF  [STAND-OFF]  157.99,80.26 0 top
JP253  FIDUCIALUFIDUCIAL  [MICRO-FIDUCIAL]  160.91,59.56 0 top
JP254  FIDUCIALUFIDUCIAL  [MICRO-FIDUCIAL]  137.16,83.31 0 top
JP255  [SMT-JUMPER_3_2-NC_PASTE_SILK]  149.1,75.18 0 top
JP256  [SMT-JUMPER_2_NO_SILK]  157.99,75.82 90 top
JP257  [SMT-JUMPER_2_NO_SILK]  154.81,75.82 90 top
JP258  [SMT-JUMPER_2_NC_TRACE_SILK]  154.18,67.56 270 bottom
JP259  FIDUCIALUFIDUCIAL  [MICRO-FIDUCIAL]  137.16,83.31 0 bottom
JP260  FIDUCIALUFIDUCIAL  [MICRO-FIDUCIAL]  160.91,59.56 0 bottom
JP261  STAND-OFF  [STAND-OFF]  166.12,80.26 0 top
JP262  STAND-OFF  [STAND-OFF]  183.9,80.26 0 top
JP263  FIDUCIALUFIDUCIAL  [MICRO-FIDUCIAL]  186.82,59.56 0 top
JP264  FIDUCIALUFIDUCIAL  [MICRO-FIDUCIAL]  163.07,83.31 0 top
JP265  [SMT-JUMPER_3_2-NC_PASTE_SILK]  175.01,75.18 0 top
JP266  [SMT-JUMPER_2_NO_SILK]  183.9,75.82 90 top
JP267  [SMT-JUMPER_2_NO_SILK]  180.72,75.82 90 top
JP268  [SMT-JUMPER_2_NC_TRACE_SILK]  180.09,67.56 270 bottom
JP269  FIDUCIALUFIDUCIAL  [MICRO-FIDUCIAL]  163.07,83.31 0 bottom
JP270  FIDUCIALUFIDUCIAL  [MICRO-FIDUCIAL]  186.82,59.56 0 bottom
JP271  STAND-OFF  [STAND-OFF]  192.02,80.26 0 top
JP272  STAND-OFF  [STAND-OFF]  209.8,80.26 0 top
JP273  FIDUCIALUFIDUCIAL  [MICRO-FIDUCIAL]  212.72,59.56 0 top
JP274  FIDUCIALUFIDUCIAL  [MICRO-FIDUCIAL]  188.98,83.31 0 top
JP275  [SMT-JUMPER_3_2-NC_PASTE_SILK]  200.91,75.18 0 top
JP276  [SMT-JUMPER_2_NO_SILK]  209.8,75.82 90 top
JP277  [SMT-JUMPER_2_NO_SILK]  206.63,75.82 90 top
JP278  [SMT-JUMPER_2_NC_TRACE_SILK]  205.99,67.56 270 bottom
JP279  FIDUCIALUFIDUCIAL  [MICRO-FIDUCIAL]  188.98,83.31 0 bottom
JP280  FIDUCIALUFIDUCIAL  [MICRO-FIDUCIAL]  212.72,59.56 0 bottom
JP281  STAND-OFF  [STAND-OFF]  217.93,80.26 0 top
JP282  STAND-OFF  [STAND-OFF]  235.71,80.26 0 top
JP283  FIDUCIALUFIDUCIAL  [MICRO-FIDUCIAL]  238.63,59.56 0 top
JP284  FIDUCIALUFIDUCIAL  [MICRO-FIDUCIAL]  214.88,83.31 0 top
JP285  [SMT-JUMPER_3_2-NC_PASTE_SILK]  226.82,75.18 0 top
JP286  [SMT-JUMPER_2_NO_SILK]  235.71,75.82 90 top
JP287  [SMT-JUMPER_2_NO_SILK]  232.54,75.82 90 top
JP288  [SMT-JUMPER_2_NC_TRACE_SILK]  231.9,67.56 270 bottom
JP289  FIDUCIALUFIDUCIAL  [MICRO-FIDUCIAL]  214.88,83.31 0 bottom
JP290  FIDUCIALUFIDUCIAL  [MICRO-FIDUCIAL]  238.63,59.56 0 bottom
JP291  STAND-OFF  [STAND-OFF]  243.84,80.26 0 top
JP292  STAND-OFF  [STAND-OFF]  261.62,80.26 0 top
JP293  FIDUCIALUFIDUCIAL  [MICRO-FIDUCIAL]  264.54,59.56 0 top
JP294  FIDUCIALUFIDUCIAL  [MICRO-FIDUCIAL]  240.79,83.31 0 top
JP295  [SMT-JUMPER_3_2-NC_PASTE_SILK]  252.73,75.18 0 top
JP296  [SMT-JUMPER_2_NO_SILK]  261.62,75.82 90 top
JP297  [SMT-JUMPER_2_NO_SILK]  258.44,75.82 90 top
JP298  [SMT-JUMPER_2_NC_TRACE_SILK]  257.81,67.56 270 bottom
JP299  FIDUCIALUFIDUCIAL  [MICRO-FIDUCIAL]  240.79,83.31 0 bottom
JP300  FIDUCIALUFIDUCIAL  [MICRO-FIDUCIAL]  264.54,59.56 0 bottom
JP301  STAND-OFF  [STAND-OFF]  10.67,106.17 0 top
JP302  STAND-OFF  [STAND-OFF]  28.45,106.17 0 top
JP303  FIDUCIALUFIDUCIAL  [MICRO-FIDUCIAL]  31.37,85.47 0 top
JP304  FIDUCIALUFIDUCIAL  [MICRO-FIDUCIAL]  7.62,109.22 0 top
JP305  [SMT-JUMPER_3_2-NC_PASTE_SILK]  19.56,101.09 0 top
JP306  [SMT-JUMPER_2_NO_SILK]  28.45,101.73 90 top
JP307  [SMT-JUMPER_2_NO_SILK]  25.27,101.73 90 top
JP308  [SMT-JUMPER_2_NC_TRACE_SILK]  24.64,93.47 270 bottom
JP309  FIDUCIALUFIDUCIAL  [MICRO-FIDUCIAL]  7.62,109.22 0 bottom
JP310  FIDUCIALUFIDUCIAL  [MICRO-FIDUCIAL]  31.37,85.47 0 bottom
JP311  STAND-OFF  [STAND-OFF]  36.58,106.17 0 top
JP312  STAND-OFF  [STAND-OFF]  54.36,106.17 0 top
JP313  FIDUCIALUFIDUCIAL  [MICRO-FIDUCIAL]  57.28,85.47 0 top
JP314  FIDUCIALUFIDUCIAL  [MICRO-FIDUCIAL]  33.53,109.22 0 top
JP315  [SMT-JUMPER_3_2-NC_PASTE_SILK]  45.47,101.09 0 top
JP316  [SMT-JUMPER_2_NO_SILK]  54.36,101.73 90 top
JP317  [SMT-JUMPER_2_NO_SILK]  51.18,101.73 90 top
JP318  [SMT-JUMPER_2_NC_TRACE_SILK]  50.55,93.47 270 bottom
JP319  FIDUCIALUFIDUCIAL  [MICRO-FIDUCIAL]  33.53,109.22 0 bottom
JP320  FIDUCIALUFIDUCIAL  [MICRO-FIDUCIAL]  57.28,85.47 0 bottom
JP321  STAND-OFF  [STAND-OFF]  62.48,106.17 0 top
JP322  STAND-OFF  [STAND-OFF]  80.26,106.17 0 top
JP323  FIDUCIALUFIDUCIAL  [MICRO-FIDUCIAL]  83.19,85.47 0 top
JP324  FIDUCIALUFIDUCIAL  [MICRO-FIDUCIAL]  59.44,109.22 0 top
JP325  [SMT-JUMPER_3_2-NC_PASTE_SILK]  71.37,101.09 0 top
JP326  [SMT-JUMPER_2_NO_SILK]  80.26,101.73 90 top
JP327  [SMT-JUMPER_2_NO_SILK]  77.09,101.73 90 top
JP328  [SMT-JUMPER_2_NC_TRACE_SILK]  76.45,93.47 270 bottom
JP329  FIDUCIALUFIDUCIAL  [MICRO-FIDUCIAL]  59.44,109.22 0 bottom
JP330  FIDUCIALUFIDUCIAL  [MICRO-FIDUCIAL]  83.19,85.47 0 bottom
JP331  STAND-OFF  [STAND-OFF]  88.39,106.17 0 top
JP332  STAND-OFF  [STAND-OFF]  106.17,106.17 0 top
JP333  FIDUCIALUFIDUCIAL  [MICRO-FIDUCIAL]  109.09,85.47 0 top
JP334  FIDUCIALUFIDUCIAL  [MICRO-FIDUCIAL]  85.34,109.22 0 top
JP335  [SMT-JUMPER_3_2-NC_PASTE_SILK]  97.28,101.09 0 top
JP336  [SMT-JUMPER_2_NO_SILK]  106.17,101.73 90 top
JP337  [SMT-JUMPER_2_NO_SILK]  103,101.73 90 top
JP338  [SMT-JUMPER_2_NC_TRACE_SILK]  102.36,93.47 270 bottom
JP339  FIDUCIALUFIDUCIAL  [MICRO-FIDUCIAL]  85.34,109.22 0 bottom
JP340  FIDUCIALUFIDUCIAL  [MICRO-FIDUCIAL]  109.09,85.47 0 bottom
JP341  STAND-OFF  [STAND-OFF]  114.3,106.17 0 top
JP342  STAND-OFF  [STAND-OFF]  132.08,106.17 0 top
JP343  FIDUCIALUFIDUCIAL  [MICRO-FIDUCIAL]  135,85.47 0 top
JP344  FIDUCIALUFIDUCIAL  [MICRO-FIDUCIAL]  111.25,109.22 0 top
JP345  [SMT-JUMPER_3_2-NC_PASTE_SILK]  123.19,101.09 0 top
JP346  [SMT-JUMPER_2_NO_SILK]  132.08,101.73 90 top
JP347  [SMT-JUMPER_2_NO_SILK]  128.91,101.73 90 top
JP348  [SMT-JUMPER_2_NC_TRACE_SILK]  128.27,93.47 270 bottom
JP349  FIDUCIALUFIDUCIAL  [MICRO-FIDUCIAL]  111.25,109.22 0 bottom
JP350  FIDUCIALUFIDUCIAL  [MICRO-FIDUCIAL]  135,85.47 0 bottom
JP351  STAND-OFF  [STAND-OFF]  140.21,106.17 0 top
JP352  STAND-OFF  [STAND-OFF]  157.99,106.17 0 top
JP353  FIDUCIALUFIDUCIAL  [MICRO-FIDUCIAL]  160.91,85.47 0 top
JP354  FIDUCIALUFIDUCIAL  [MICRO-FIDUCIAL]  137.16,109.22 0 top
JP355  [SMT-JUMPER_3_2-NC_PASTE_SILK]  149.1,101.09 0 top
JP356  [SMT-JUMPER_2_NO_SILK]  157.99,101.73 90 top
JP357  [SMT-JUMPER_2_NO_SILK]  154.81,101.73 90 top
JP358  [SMT-JUMPER_2_NC_TRACE_SILK]  154.18,93.47 270 bottom
JP359  FIDUCIALUFIDUCIAL  [MICRO-FIDUCIAL]  137.16,109.22 0 bottom
JP360  FIDUCIALUFIDUCIAL  [MICRO-FIDUCIAL]  160.91,85.47 0 bottom
JP361  STAND-OFF  [STAND-OFF]  166.12,106.17 0 top
JP362  STAND-OFF  [STAND-OFF]  183.9,106.17 0 top
JP363  FIDUCIALUFIDUCIAL  [MICRO-FIDUCIAL]  186.82,85.47 0 top
JP364  FIDUCIALUFIDUCIAL  [MICRO-FIDUCIAL]  163.07,109.22 0 top
JP365  [SMT-JUMPER_3_2-NC_PASTE_SILK]  175.01,101.09 0 top
JP366  [SMT-JUMPER_2_NO_SILK]  183.9,101.73 90 top
JP367  [SMT-JUMPER_2_NO_SILK]  180.72,101.73 90 top
JP368  [SMT-JUMPER_2_NC_TRACE_SILK]  180.09,93.47 270 bottom
JP369  FIDUCIALUFIDUCIAL  [MICRO-FIDUCIAL]  163.07,109.22 0 bottom
JP370  FIDUCIALUFIDUCIAL  [MICRO-FIDUCIAL]  186.82,85.47 0 bottom
JP371  STAND-OFF  [STAND-OFF]  192.02,106.17 0 top
JP372  STAND-OFF  [STAND-OFF]  209.8,106.17 0 top
JP373  FIDUCIALUFIDUCIAL  [MICRO-FIDUCIAL]  212.72,85.47 0 top
JP374  FIDUCIALUFIDUCIAL  [MICRO-FIDUCIAL]  188.98,109.22 0 top
JP375  [SMT-JUMPER_3_2-NC_PASTE_SILK]  200.91,101.09 0 top
JP376  [SMT-JUMPER_2_NO_SILK]  209.8,101.73 90 top
JP377  [SMT-JUMPER_2_NO_SILK]  206.63,101.73 90 top
JP378  [SMT-JUMPER_2_NC_TRACE_SILK]  205.99,93.47 270 bottom
JP379  FIDUCIALUFIDUCIAL  [MICRO-FIDUCIAL]  188.98,109.22 0 bottom
JP380  FIDUCIALUFIDUCIAL  [MICRO-FIDUCIAL]  212.72,85.47 0 bottom
JP381  STAND-OFF  [STAND-OFF]  217.93,106.17 0 top
JP382  STAND-OFF  [STAND-OFF]  235.71,106.17 0 top
JP383  FIDUCIALUFIDUCIAL  [MICRO-FIDUCIAL]  238.63,85.47 0 top
JP384  FIDUCIALUFIDUCIAL  [MICRO-FIDUCIAL]  214.88,109.22 0 top
JP385  [SMT-JUMPER_3_2-NC_PASTE_SILK]  226.82,101.09 0 top
JP386  [SMT-JUMPER_2_NO_SILK]  235.71,101.73 90 top
JP387  [SMT-JUMPER_2_NO_SILK]  232.54,101.73 90 top
JP388  [SMT-JUMPER_2_NC_TRACE_SILK]  231.9,93.47 270 bottom
JP389  FIDUCIALUFIDUCIAL  [MICRO-FIDUCIAL]  214.88,109.22 0 bottom
JP390  FIDUCIALUFIDUCIAL  [MICRO-FIDUCIAL]  238.63,85.47 0 bottom
JP391  STAND-OFF  [STAND-OFF]  243.84,106.17 0 top
JP392  STAND-OFF  [STAND-OFF]  261.62,106.17 0 top
JP393  FIDUCIALUFIDUCIAL  [MICRO-FIDUCIAL]  264.54,85.47 0 top
JP394  FIDUCIALUFIDUCIAL  [MICRO-FIDUCIAL]  240.79,109.22 0 top
JP395  [SMT-JUMPER_3_2-NC_PASTE_SILK]  252.73,101.09 0 top
JP396  [SMT-JUMPER_2_NO_SILK]  261.62,101.73 90 top
JP397  [SMT-JUMPER_2_NO_SILK]  258.44,101.73 90 top
JP398  [SMT-JUMPER_2_NC_TRACE_SILK]  257.81,93.47 270 bottom
JP399  FIDUCIALUFIDUCIAL  [MICRO-FIDUCIAL]  240.79,109.22 0 bottom
JP400  FIDUCIALUFIDUCIAL  [MICRO-FIDUCIAL]  264.54,85.47 0 bottom
JP401  STAND-OFF  [STAND-OFF]  10.67,132.08 0 top
JP402  STAND-OFF  [STAND-OFF]  28.45,132.08 0 top
JP403  FIDUCIALUFIDUCIAL  [MICRO-FIDUCIAL]  31.37,111.38 0 top
JP404  FIDUCIALUFIDUCIAL  [MICRO-FIDUCIAL]  7.62,135.13 0 top
JP405  [SMT-JUMPER_3_2-NC_PASTE_SILK]  19.56,127 0 top
JP406  [SMT-JUMPER_2_NO_SILK]  28.45,127.64 90 top
JP407  [SMT-JUMPER_2_NO_SILK]  25.27,127.64 90 top
JP408  [SMT-JUMPER_2_NC_TRACE_SILK]  24.64,119.38 270 bottom
JP409  FIDUCIALUFIDUCIAL  [MICRO-FIDUCIAL]  7.62,135.13 0 bottom
JP410  FIDUCIALUFIDUCIAL  [MICRO-FIDUCIAL]  31.37,111.38 0 bottom
JP411  STAND-OFF  [STAND-OFF]  36.58,132.08 0 top
JP412  STAND-OFF  [STAND-OFF]  54.36,132.08 0 top
JP413  FIDUCIALUFIDUCIAL  [MICRO-FIDUCIAL]  57.28,111.38 0 top
JP414  FIDUCIALUFIDUCIAL  [MICRO-FIDUCIAL]  33.53,135.13 0 top
JP415  [SMT-JUMPER_3_2-NC_PASTE_SILK]  45.47,127 0 top
JP416  [SMT-JUMPER_2_NO_SILK]  54.36,127.64 90 top
JP417  [SMT-JUMPER_2_NO_SILK]  51.18,127.64 90 top
JP418  [SMT-JUMPER_2_NC_TRACE_SILK]  50.55,119.38 270 bottom
JP419  FIDUCIALUFIDUCIAL  [MICRO-FIDUCIAL]  33.53,135.13 0 bottom
JP420  FIDUCIALUFIDUCIAL  [MICRO-FIDUCIAL]  57.28,111.38 0 bottom
JP421  STAND-OFF  [STAND-OFF]  62.48,132.08 0 top
JP422  STAND-OFF  [STAND-OFF]  80.26,132.08 0 top
JP423  FIDUCIALUFIDUCIAL  [MICRO-FIDUCIAL]  83.19,111.38 0 top
JP424  FIDUCIALUFIDUCIAL  [MICRO-FIDUCIAL]  59.44,135.13 0 top
JP425  [SMT-JUMPER_3_2-NC_PASTE_SILK]  71.37,127 0 top
JP426  [SMT-JUMPER_2_NO_SILK]  80.26,127.64 90 top
JP427  [SMT-JUMPER_2_NO_SILK]  77.09,127.64 90 top
JP428  [SMT-JUMPER_2_NC_TRACE_SILK]  76.45,119.38 270 bottom
JP429  FIDUCIALUFIDUCIAL  [MICRO-FIDUCIAL]  59.44,135.13 0 bottom
JP430  FIDUCIALUFIDUCIAL  [MICRO-FIDUCIAL]  83.19,111.38 0 bottom
JP431  STAND-OFF  [STAND-OFF]  88.39,132.08 0 top
JP432  STAND-OFF  [STAND-OFF]  106.17,132.08 0 top
JP433  FIDUCIALUFIDUCIAL  [MICRO-FIDUCIAL]  109.09,111.38 0 top
JP434  FIDUCIALUFIDUCIAL  [MICRO-FIDUCIAL]  85.34,135.13 0 top
JP435  [SMT-JUMPER_3_2-NC_PASTE_SILK]  97.28,127 0 top
JP436  [SMT-JUMPER_2_NO_SILK]  106.17,127.64 90 top
JP437  [SMT-JUMPER_2_NO_SILK]  103,127.64 90 top
JP438  [SMT-JUMPER_2_NC_TRACE_SILK]  102.36,119.38 270 bottom
JP439  FIDUCIALUFIDUCIAL  [MICRO-FIDUCIAL]  85.34,135.13 0 bottom
JP440  FIDUCIALUFIDUCIAL  [MICRO-FIDUCIAL]  109.09,111.38 0 bottom
JP441  STAND-OFF  [STAND-OFF]  114.3,132.08 0 top
JP442  STAND-OFF  [STAND-OFF]  132.08,132.08 0 top
JP443  FIDUCIALUFIDUCIAL  [MICRO-FIDUCIAL]  135,111.38 0 top
JP444  FIDUCIALUFIDUCIAL  [MICRO-FIDUCIAL]  111.25,135.13 0 top
JP445  [SMT-JUMPER_3_2-NC_PASTE_SILK]  123.19,127 0 top
JP446  [SMT-JUMPER_2_NO_SILK]  132.08,127.64 90 top
JP447  [SMT-JUMPER_2_NO_SILK]  128.91,127.64 90 top
JP448  [SMT-JUMPER_2_NC_TRACE_SILK]  128.27,119.38 270 bottom
JP449  FIDUCIALUFIDUCIAL  [MICRO-FIDUCIAL]  111.25,135.13 0 bottom
JP450  FIDUCIALUFIDUCIAL  [MICRO-FIDUCIAL]  135,111.38 0 bottom
JP451  STAND-OFF  [STAND-OFF]  140.21,132.08 0 top
JP452  STAND-OFF  [STAND-OFF]  157.99,132.08 0 top
JP453  FIDUCIALUFIDUCIAL  [MICRO-FIDUCIAL]  160.91,111.38 0 top
JP454  FIDUCIALUFIDUCIAL  [MICRO-FIDUCIAL]  137.16,135.13 0 top
JP455  [SMT-JUMPER_3_2-NC_PASTE_SILK]  149.1,127 0 top
JP456  [SMT-JUMPER_2_NO_SILK]  157.99,127.64 90 top
JP457  [SMT-JUMPER_2_NO_SILK]  154.81,127.64 90 top
JP458  [SMT-JUMPER_2_NC_TRACE_SILK]  154.18,119.38 270 bottom
JP459  FIDUCIALUFIDUCIAL  [MICRO-FIDUCIAL]  137.16,135.13 0 bottom
JP460  FIDUCIALUFIDUCIAL  [MICRO-FIDUCIAL]  160.91,111.38 0 bottom
JP461  STAND-OFF  [STAND-OFF]  166.12,132.08 0 top
JP462  STAND-OFF  [STAND-OFF]  183.9,132.08 0 top
JP463  FIDUCIALUFIDUCIAL  [MICRO-FIDUCIAL]  186.82,111.38 0 top
JP464  FIDUCIALUFIDUCIAL  [MICRO-FIDUCIAL]  163.07,135.13 0 top
JP465  [SMT-JUMPER_3_2-NC_PASTE_SILK]  175.01,127 0 top
JP466  [SMT-JUMPER_2_NO_SILK]  183.9,127.64 90 top
JP467  [SMT-JUMPER_2_NO_SILK]  180.72,127.64 90 top
JP468  [SMT-JUMPER_2_NC_TRACE_SILK]  180.09,119.38 270 bottom
JP469  FIDUCIALUFIDUCIAL  [MICRO-FIDUCIAL]  163.07,135.13 0 bottom
JP470  FIDUCIALUFIDUCIAL  [MICRO-FIDUCIAL]  186.82,111.38 0 bottom
JP471  STAND-OFF  [STAND-OFF]  192.02,132.08 0 top
JP472  STAND-OFF  [STAND-OFF]  209.8,132.08 0 top
JP473  FIDUCIALUFIDUCIAL  [MICRO-FIDUCIAL]  212.72,111.38 0 top
JP474  FIDUCIALUFIDUCIAL  [MICRO-FIDUCIAL]  188.98,135.13 0 top
JP475  [SMT-JUMPER_3_2-NC_PASTE_SILK]  200.91,127 0 top
JP476  [SMT-JUMPER_2_NO_SILK]  209.8,127.64 90 top
JP477  [SMT-JUMPER_2_NO_SILK]  206.63,127.64 90 top
JP478  [SMT-JUMPER_2_NC_TRACE_SILK]  205.99,119.38 270 bottom
JP479  FIDUCIALUFIDUCIAL  [MICRO-FIDUCIAL]  188.98,135.13 0 bottom
JP480  FIDUCIALUFIDUCIAL  [MICRO-FIDUCIAL]  212.72,111.38 0 bottom
JP481  STAND-OFF  [STAND-OFF]  217.93,132.08 0 top
JP482  STAND-OFF  [STAND-OFF]  235.71,132.08 0 top
JP483  FIDUCIALUFIDUCIAL  [MICRO-FIDUCIAL]  238.63,111.38 0 top
JP484  FIDUCIALUFIDUCIAL  [MICRO-FIDUCIAL]  214.88,135.13 0 top
JP485  [SMT-JUMPER_3_2-NC_PASTE_SILK]  226.82,127 0 top
JP486  [SMT-JUMPER_2_NO_SILK]  235.71,127.64 90 top
JP487  [SMT-JUMPER_2_NO_SILK]  232.54,127.64 90 top
JP488  [SMT-JUMPER_2_NC_TRACE_SILK]  231.9,119.38 270 bottom
JP489  FIDUCIALUFIDUCIAL  [MICRO-FIDUCIAL]  214.88,135.13 0 bottom
JP490  FIDUCIALUFIDUCIAL  [MICRO-FIDUCIAL]  238.63,111.38 0 bottom
JP491  STAND-OFF  [STAND-OFF]  243.84,132.08 0 top
JP492  STAND-OFF  [STAND-OFF]  261.62,132.08 0 top
JP493  FIDUCIALUFIDUCIAL  [MICRO-FIDUCIAL]  264.54,111.38 0 top
JP494  FIDUCIALUFIDUCIAL  [MICRO-FIDUCIAL]  240.79,135.13 0 top
JP495  [SMT-JUMPER_3_2-NC_PASTE_SILK]  252.73,127 0 top
JP496  [SMT-JUMPER_2_NO_SILK]  261.62,127.64 90 top
JP497  [SMT-JUMPER_2_NO_SILK]  258.44,127.64 90 top
JP498  [SMT-JUMPER_2_NC_TRACE_SILK]  257.81,119.38 270 bottom
JP499  FIDUCIALUFIDUCIAL  [MICRO-FIDUCIAL]  240.79,135.13 0 bottom
JP500  FIDUCIALUFIDUCIAL  [MICRO-FIDUCIAL]  264.54,111.38 0 bottom
LOGO1  OSHW-LOGOMINI  [OSHW-LOGO-MINI]  9.4,10.67 0 bottom
LOGO2  SFE_LOGO_NAME.1_INCH  [SFE_LOGO_NAME_.1]  13.46,24.64 0 top
LOGO3  OSHW-LOGOMINI  [OSHW-LOGO-MINI]  35.31,10.67 0 bottom
LOGO4  SFE_LOGO_NAME.1_INCH  [SFE_LOGO_NAME_.1]  39.37,24.64 0 top
LOGO5  OSHW-LOGOMINI  [OSHW-LOGO-MINI]  61.21,10.67 0 bottom
LOGO6  SFE_LOGO_NAME.1_INCH  [SFE_LOGO_NAME_.1]  65.28,24.64 0 top
LOGO7  OSHW-LOGOMINI  [OSHW-LOGO-MINI]  87.12,10.67 0 bottom
LOGO8  SFE_LOGO_NAME.1_INCH  [SFE_LOGO_NAME_.1]  91.19,24.64 0 top
LOGO9  OSHW-LOGOMINI  [OSHW-LOGO-MINI]  113.03,10.67 0 bottom
LOGO10  SFE_LOGO_NAME.1_INCH  [SFE_LOGO_NAME_.1]  117.09,24.64 0 top
LOGO11  OSHW-LOGOMINI  [OSHW-LOGO-MINI]  138.94,10.67 0 bottom
LOGO12  SFE_LOGO_NAME.1_INCH  [SFE_LOGO_NAME_.1]  143,24.64 0 top
LOGO13  OSHW-LOGOMINI  [OSHW-LOGO-MINI]  164.85,10.67 0 bottom
LOGO14  SFE_LOGO_NAME.1_INCH  [SFE_LOGO_NAME_.1]  168.91,24.64 0 top
LOGO15  OSHW-LOGOMINI  [OSHW-LOGO-MINI]  190.75,10.67 0 bottom
LOGO16  SFE_LOGO_NAME.1_INCH  [SFE_LOGO_NAME_.1]  194.82,24.64 0 top
LOGO17  OSHW-LOGOMINI  [OSHW-LOGO-MINI]  216.66,10.67 0 bottom
LOGO18  SFE_LOGO_NAME.1_INCH  [SFE_LOGO_NAME_.1]  220.73,24.64 0 top
LOGO19  OSHW-LOGOMINI  [OSHW-LOGO-MINI]  242.57,10.67 0 bottom
LOGO20  SFE_LOGO_NAME.1_INCH  [SFE_LOGO_NAME_.1]  246.63,24.64 0 top
LOGO21  OSHW-LOGOMINI  [OSHW-LOGO-MINI]  9.4,36.58 0 bottom
LOGO22  SFE_LOGO_NAME.1_INCH  [SFE_LOGO_NAME_.1]  13.46,50.55 0 top
LOGO23  OSHW-LOGOMINI  [OSHW-LOGO-MINI]  35.31,36.58 0 bottom
LOGO24  SFE_LOGO_NAME.1_INCH  [SFE_LOGO_NAME_.1]  39.37,50.55 0 top
LOGO25  OSHW-LOGOMINI  [OSHW-LOGO-MINI]  61.21,36.58 0 bottom
LOGO26  SFE_LOGO_NAME.1_INCH  [SFE_LOGO_NAME_.1]  65.28,50.55 0 top
LOGO27  OSHW-LOGOMINI  [OSHW-LOGO-MINI]  87.12,36.58 0 bottom
LOGO28  SFE_LOGO_NAME.1_INCH  [SFE_LOGO_NAME_.1]  91.19,50.55 0 top
LOGO29  OSHW-LOGOMINI  [OSHW-LOGO-MINI]  113.03,36.58 0 bottom
LOGO30  SFE_LOGO_NAME.1_INCH  [SFE_LOGO_NAME_.1]  117.09,50.55 0 top
LOGO31  OSHW-LOGOMINI  [OSHW-LOGO-MINI]  138.94,36.58 0 bottom
LOGO32  SFE_LOGO_NAME.1_INCH  [SFE_LOGO_NAME_.1]  143,50.55 0 top
LOGO33  OSHW-LOGOMINI  [OSHW-LOGO-MINI]  164.85,36.58 0 bottom
LOGO34  SFE_LOGO_NAME.1_INCH  [SFE_LOGO_NAME_.1]  168.91,50.55 0 top
LOGO35  OSHW-LOGOMINI  [OSHW-LOGO-MINI]  190.75,36.58 0 bottom
LOGO36  SFE_LOGO_NAME.1_INCH  [SFE_LOGO_NAME_.1]  194.82,50.55 0 top
LOGO37  OSHW-LOGOMINI  [OSHW-LOGO-MINI]  216.66,36.58 0 bottom
LOGO38  SFE_LOGO_NAME.1_INCH  [SFE_LOGO_NAME_.1]  220.73,50.55 0 top
LOGO39  OSHW-LOGOMINI  [OSHW-LOGO-MINI]  242.57,36.58 0 bottom
LOGO40  SFE_LOGO_NAME.1_INCH  [SFE_LOGO_NAME_.1]  246.63,50.55 0 top
LOGO41  OSHW-LOGOMINI  [OSHW-LOGO-MINI]  9.4,62.48 0 bottom
LOGO42  SFE_LOGO_NAME.1_INCH  [SFE_LOGO_NAME_.1]  13.46,76.45 0 top
LOGO43  OSHW-LOGOMINI  [OSHW-LOGO-MINI]  35.31,62.48 0 bottom
LOGO44  SFE_LOGO_NAME.1_INCH  [SFE_LOGO_NAME_.1]  39.37,76.45 0 top
LOGO45  OSHW-LOGOMINI  [OSHW-LOGO-MINI]  61.21,62.48 0 bottom
LOGO46  SFE_LOGO_NAME.1_INCH  [SFE_LOGO_NAME_.1]  65.28,76.45 0 top
LOGO47  OSHW-LOGOMINI  [OSHW-LOGO-MINI]  87.12,62.48 0 bottom
LOGO48  SFE_LOGO_NAME.1_INCH  [SFE_LOGO_NAME_.1]  91.19,76.45 0 top
LOGO49  OSHW-LOGOMINI  [OSHW-LOGO-MINI]  113.03,62.48 0 bottom
LOGO50  SFE_LOGO_NAME.1_INCH  [SFE_LOGO_NAME_.1]  117.09,76.45 0 top
LOGO51  OSHW-LOGOMINI  [OSHW-LOGO-MINI]  138.94,62.48 0 bottom
LOGO52  SFE_LOGO_NAME.1_INCH  [SFE_LOGO_NAME_.1]  143,76.45 0 top
LOGO53  OSHW-LOGOMINI  [OSHW-LOGO-MINI]  164.85,62.48 0 bottom
LOGO54  SFE_LOGO_NAME.1_INCH  [SFE_LOGO_NAME_.1]  168.91,76.45 0 top
LOGO55  OSHW-LOGOMINI  [OSHW-LOGO-MINI]  190.75,62.48 0 bottom
LOGO56  SFE_LOGO_NAME.1_INCH  [SFE_LOGO_NAME_.1]  194.82,76.45 0 top
LOGO57  OSHW-LOGOMINI  [OSHW-LOGO-MINI]  216.66,62.48 0 bottom
LOGO58  SFE_LOGO_NAME.1_INCH  [SFE_LOGO_NAME_.1]  220.73,76.45 0 top
LOGO59  OSHW-LOGOMINI  [OSHW-LOGO-MINI]  242.57,62.48 0 bottom
LOGO60  SFE_LOGO_NAME.1_INCH  [SFE_LOGO_NAME_.1]  246.63,76.45 0 top
LOGO61  OSHW-LOGOMINI  [OSHW-LOGO-MINI]  9.4,88.39 0 bottom
LOGO62  SFE_LOGO_NAME.1_INCH  [SFE_LOGO_NAME_.1]  13.46,102.36 0 top
LOGO63  OSHW-LOGOMINI  [OSHW-LOGO-MINI]  35.31,88.39 0 bottom
LOGO64  SFE_LOGO_NAME.1_INCH  [SFE_LOGO_NAME_.1]  39.37,102.36 0 top
LOGO65  OSHW-LOGOMINI  [OSHW-LOGO-MINI]  61.21,88.39 0 bottom
LOGO66  SFE_LOGO_NAME.1_INCH  [SFE_LOGO_NAME_.1]  65.28,102.36 0 top
LOGO67  OSHW-LOGOMINI  [OSHW-LOGO-MINI]  87.12,88.39 0 bottom
LOGO68  SFE_LOGO_NAME.1_INCH  [SFE_LOGO_NAME_.1]  91.19,102.36 0 top
LOGO69  OSHW-LOGOMINI  [OSHW-LOGO-MINI]  113.03,88.39 0 bottom
LOGO70  SFE_LOGO_NAME.1_INCH  [SFE_LOGO_NAME_.1]  117.09,102.36 0 top
LOGO71  OSHW-LOGOMINI  [OSHW-LOGO-MINI]  138.94,88.39 0 bottom
LOGO72  SFE_LOGO_NAME.1_INCH  [SFE_LOGO_NAME_.1]  143,102.36 0 top
LOGO73  OSHW-LOGOMINI  [OSHW-LOGO-MINI]  164.85,88.39 0 bottom
LOGO74  SFE_LOGO_NAME.1_INCH  [SFE_LOGO_NAME_.1]  168.91,102.36 0 top
LOGO75  OSHW-LOGOMINI  [OSHW-LOGO-MINI]  190.75,88.39 0 bottom
LOGO76  SFE_LOGO_NAME.1_INCH  [SFE_LOGO_NAME_.1]  194.82,102.36 0 top
LOGO77  OSHW-LOGOMINI  [OSHW-LOGO-MINI]  216.66,88.39 0 bottom
LOGO78  SFE_LOGO_NAME.1_INCH  [SFE_LOGO_NAME_.1]  220.73,102.36 0 top
LOGO79  OSHW-LOGOMINI  [OSHW-LOGO-MINI]  242.57,88.39 0 bottom
LOGO80  SFE_LOGO_NAME.1_INCH  [SFE_LOGO_NAME_.1]  246.63,102.36 0 top
LOGO81  OSHW-LOGOMINI  [OSHW-LOGO-MINI]  9.4,114.3 0 bottom
LOGO82  SFE_LOGO_NAME.1_INCH  [SFE_LOGO_NAME_.1]  13.46,128.27 0 top
LOGO83  OSHW-LOGOMINI  [OSHW-LOGO-MINI]  35.31,114.3 0 bottom
LOGO84  SFE_LOGO_NAME.1_INCH  [SFE_LOGO_NAME_.1]  39.37,128.27 0 top
LOGO85  OSHW-LOGOMINI  [OSHW-LOGO-MINI]  61.21,114.3 0 bottom
LOGO86  SFE_LOGO_NAME.1_INCH  [SFE_LOGO_NAME_.1]  65.28,128.27 0 top
LOGO87  OSHW-LOGOMINI  [OSHW-LOGO-MINI]  87.12,114.3 0 bottom
LOGO88  SFE_LOGO_NAME.1_INCH  [SFE_LOGO_NAME_.1]  91.19,128.27 0 top
LOGO89  OSHW-LOGOMINI  [OSHW-LOGO-MINI]  113.03,114.3 0 bottom
LOGO90  SFE_LOGO_NAME.1_INCH  [SFE_LOGO_NAME_.1]  117.09,128.27 0 top
LOGO91  OSHW-LOGOMINI  [OSHW-LOGO-MINI]  138.94,114.3 0 bottom
LOGO92  SFE_LOGO_NAME.1_INCH  [SFE_LOGO_NAME_.1]  143,128.27 0 top
LOGO93  OSHW-LOGOMINI  [OSHW-LOGO-MINI]  164.85,114.3 0 bottom
LOGO94  SFE_LOGO_NAME.1_INCH  [SFE_LOGO_NAME_.1]  168.91,128.27 0 top
LOGO95  OSHW-LOGOMINI  [OSHW-LOGO-MINI]  190.75,114.3 0 bottom
LOGO96  SFE_LOGO_NAME.1_INCH  [SFE_LOGO_NAME_.1]  194.82,128.27 0 top
LOGO97  OSHW-LOGOMINI  [OSHW-LOGO-MINI]  216.66,114.3 0 bottom
LOGO98  SFE_LOGO_NAME.1_INCH  [SFE_LOGO_NAME_.1]  220.73,128.27 0 top
LOGO99  OSHW-LOGOMINI  [OSHW-LOGO-MINI]  242.57,114.3 0 bottom
LOGO100  SFE_LOGO_NAME.1_INCH  [SFE_LOGO_NAME_.1]  246.63,128.27 0 top
R1  10k  [0603]  24.64,19.56 270 top
R2  10k  [0603]  26.48,14.48 270 top
R3  10k  [0603]  28.45,14.48 270 top
R4  4.7k  [0603]  22.73,23.43 90 top
R5  4.7k  [0603]  14.48,23.37 90 top
R6  330  [0603]  17.65,15.75 180 top
R7  4.7k  [0603]  48.64,23.43 90 top
R8  4.7k  [0603]  40.39,23.37 90 top
R9  10k  [0603]  54.36,14.48 270 top
R10  10k  [0603]  50.55,19.56 270 top
R11  10k  [0603]  52.39,14.48 270 top
R12  330  [0603]  43.56,15.75 180 top
R13  4.7k  [0603]  74.55,23.43 90 top
R14  4.7k  [0603]  66.29,23.37 90 top
R15  10k  [0603]  80.26,14.48 270 top
R16  10k  [0603]  76.45,19.56 270 top
R17  10k  [0603]  78.3,14.48 270 top